# Altium PCB PDM.PcbDoc (part 2 of 4)
Units mm, origin at the board's own origin, x right, y up, seen from the top; angles counter-clockwise.
Board outline 150 x 150 mm, 2 copper layers (Top Layer, Bottom Layer), stack 1.58 mm thick; 183 components, 85 nets, 477 pads, 0 vias.
Unrouted connection lines stored in the file: 318.
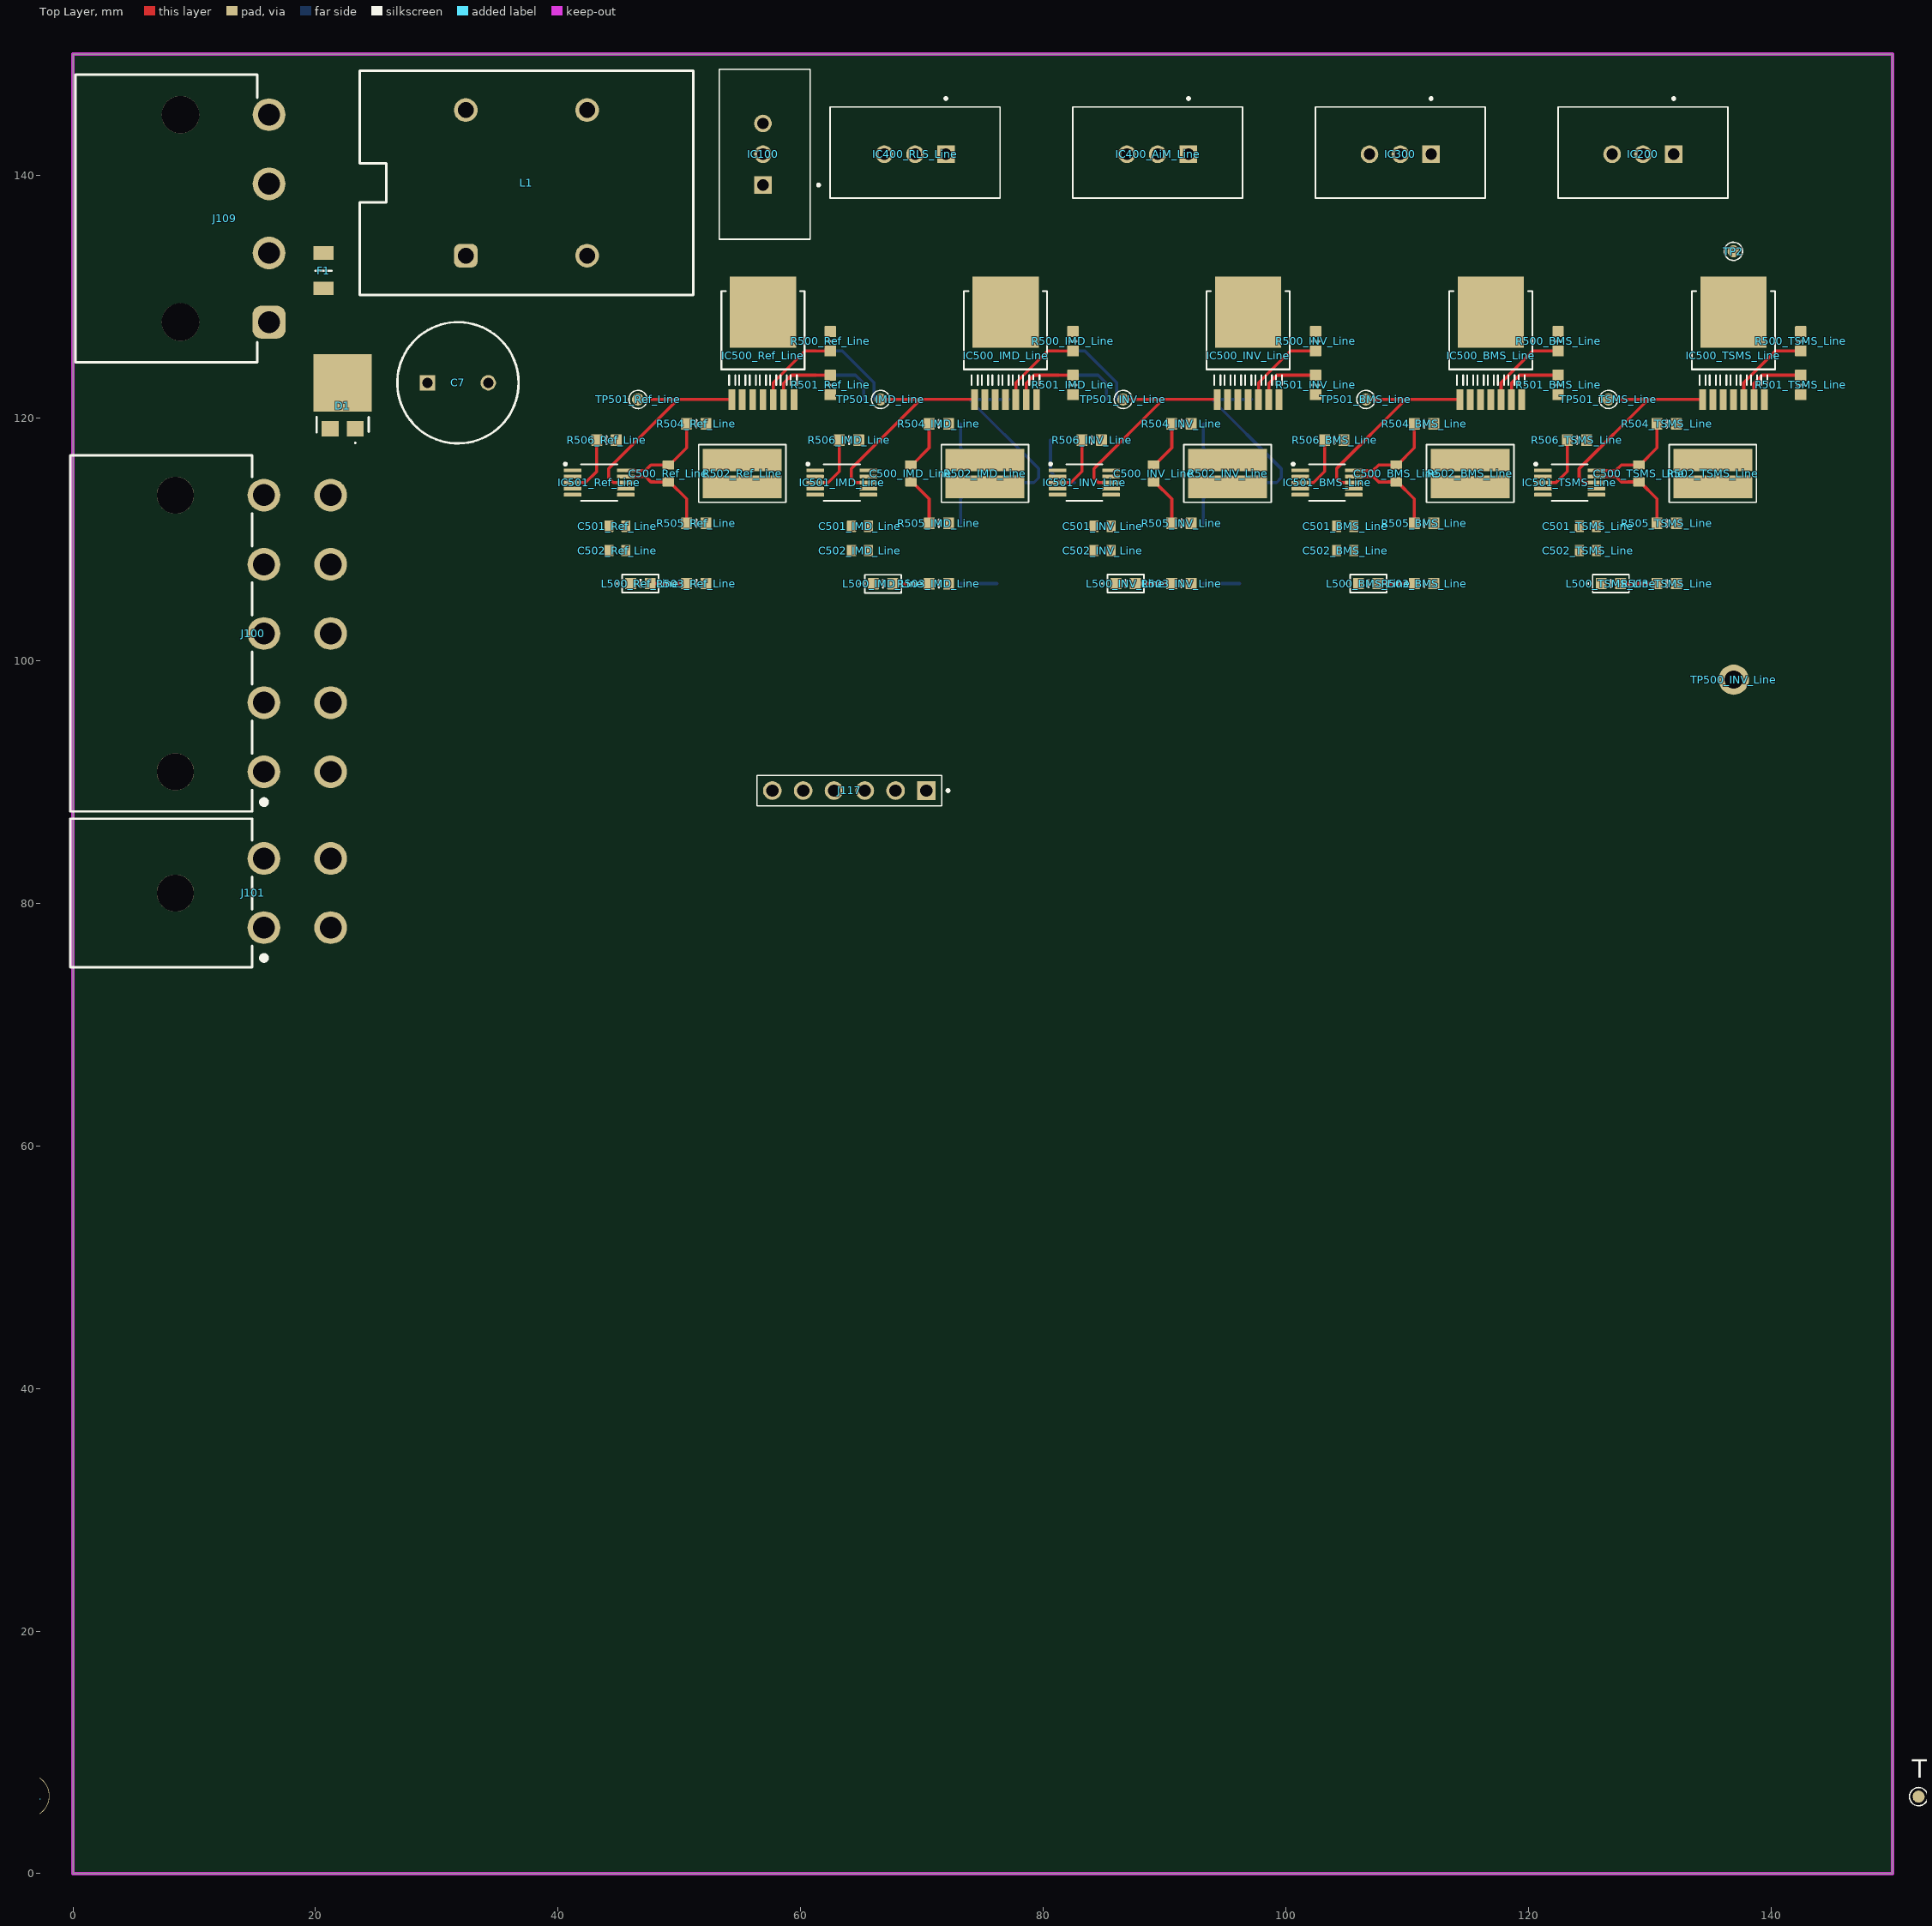
[diagram p0: Top Layer view]

## Nets (pads, with @x,y where several pads share a name; then routed paths per layer and width w, separated by ;. In a path a pad name is that pad's centre, name@x,y a point inside that pad or via, vN(x,y) a via of type N, cw(c..) or ccw(c..) an arc to the next point about the centre after c; other vN are vias at no path point) (continued)
24V_OUT_BMS_Line: J100.9 R502_BMS_Line.1 R503_BMS_Line.2 R505_BMS_Line.2 TP109.1
24V_OUT_IMD_Line: J100.8 R502_IMD_Line.1 R503_IMD_Line.2 R505_IMD_Line.2 TP108.1
24V_OUT_INV_Line: J100.10 R502_INV_Line.1 R503_INV_Line.2 R505_INV_Line.2 TP110.1
24V_OUT_Ref_Line: J100.6 R502_Ref_Line.1 R503_Ref_Line.2 R505_Ref_Line.2 TP105.1
24V_OUT_TSMS_Line: J100.7 R502_TSMS_Line.1 R503_TSMS_Line.2 R505_TSMS_Line.2 TP107.1